# Altium PCB lower-pcb.PcbDoc
Units mm, origin at the board's own origin, x right, y up, seen from the top; angles counter-clockwise.
Board outline 46.4 x 79.5 mm, 2 copper layers (Top Layer, Bottom Layer), stack 1.621 mm thick; 36 components, 27 nets, 83 pads, 4 vias.
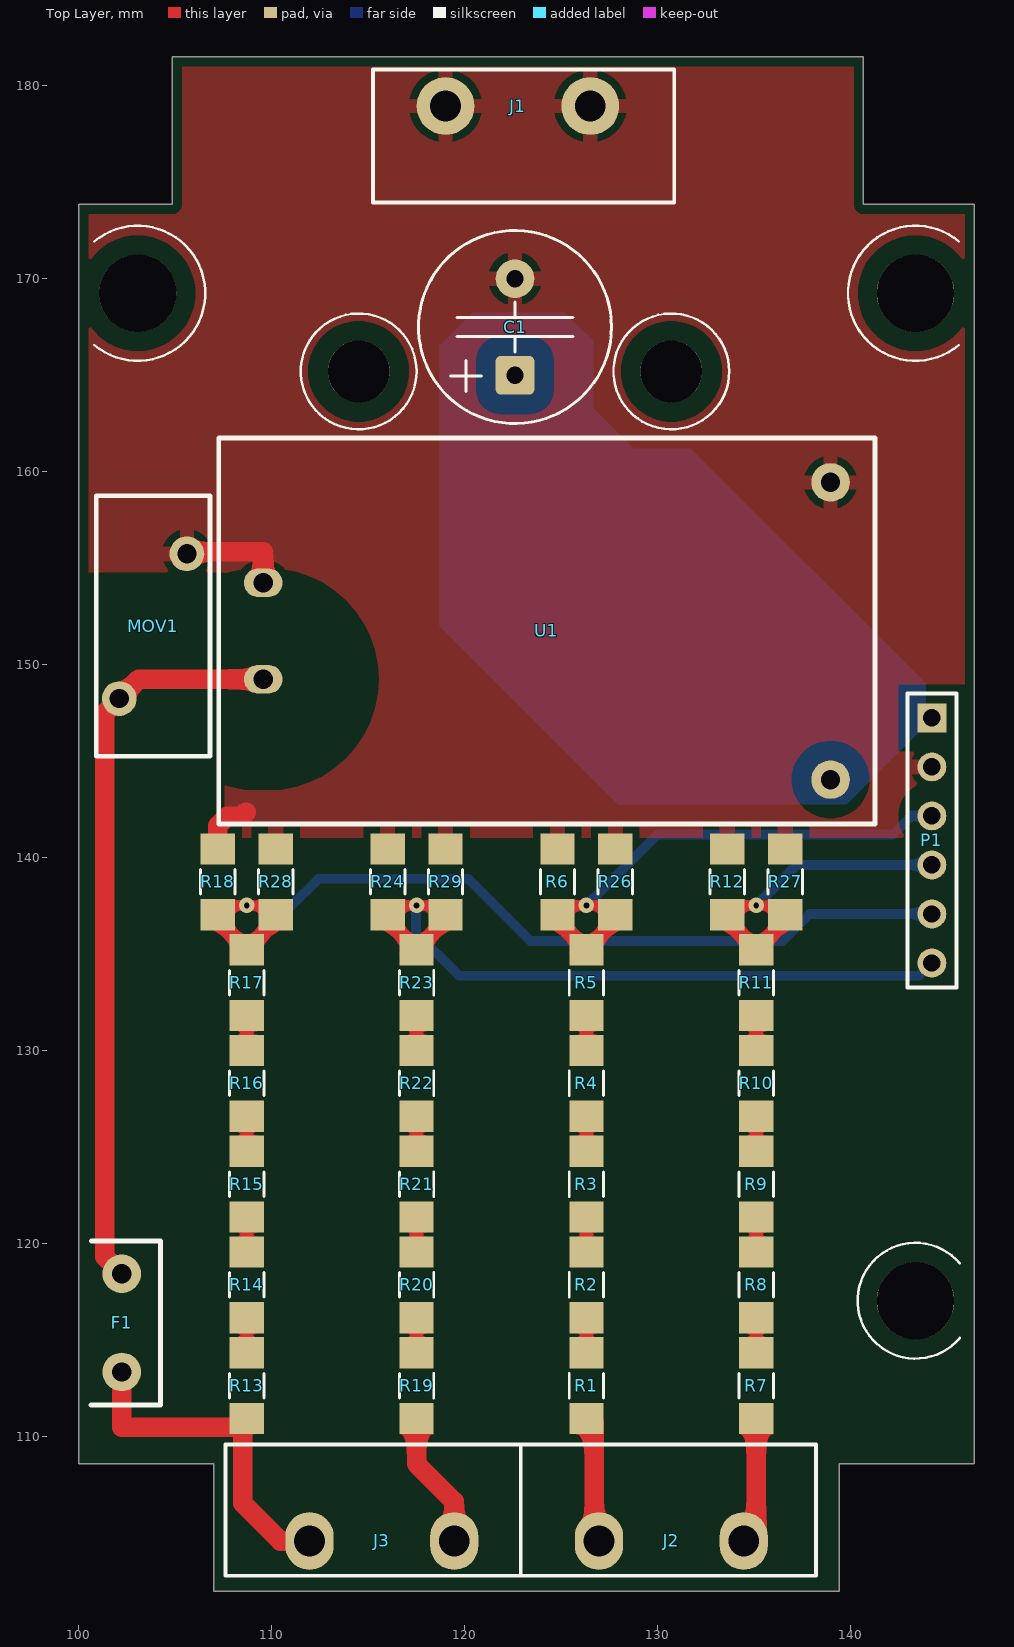
[diagram p0: Top Layer view]
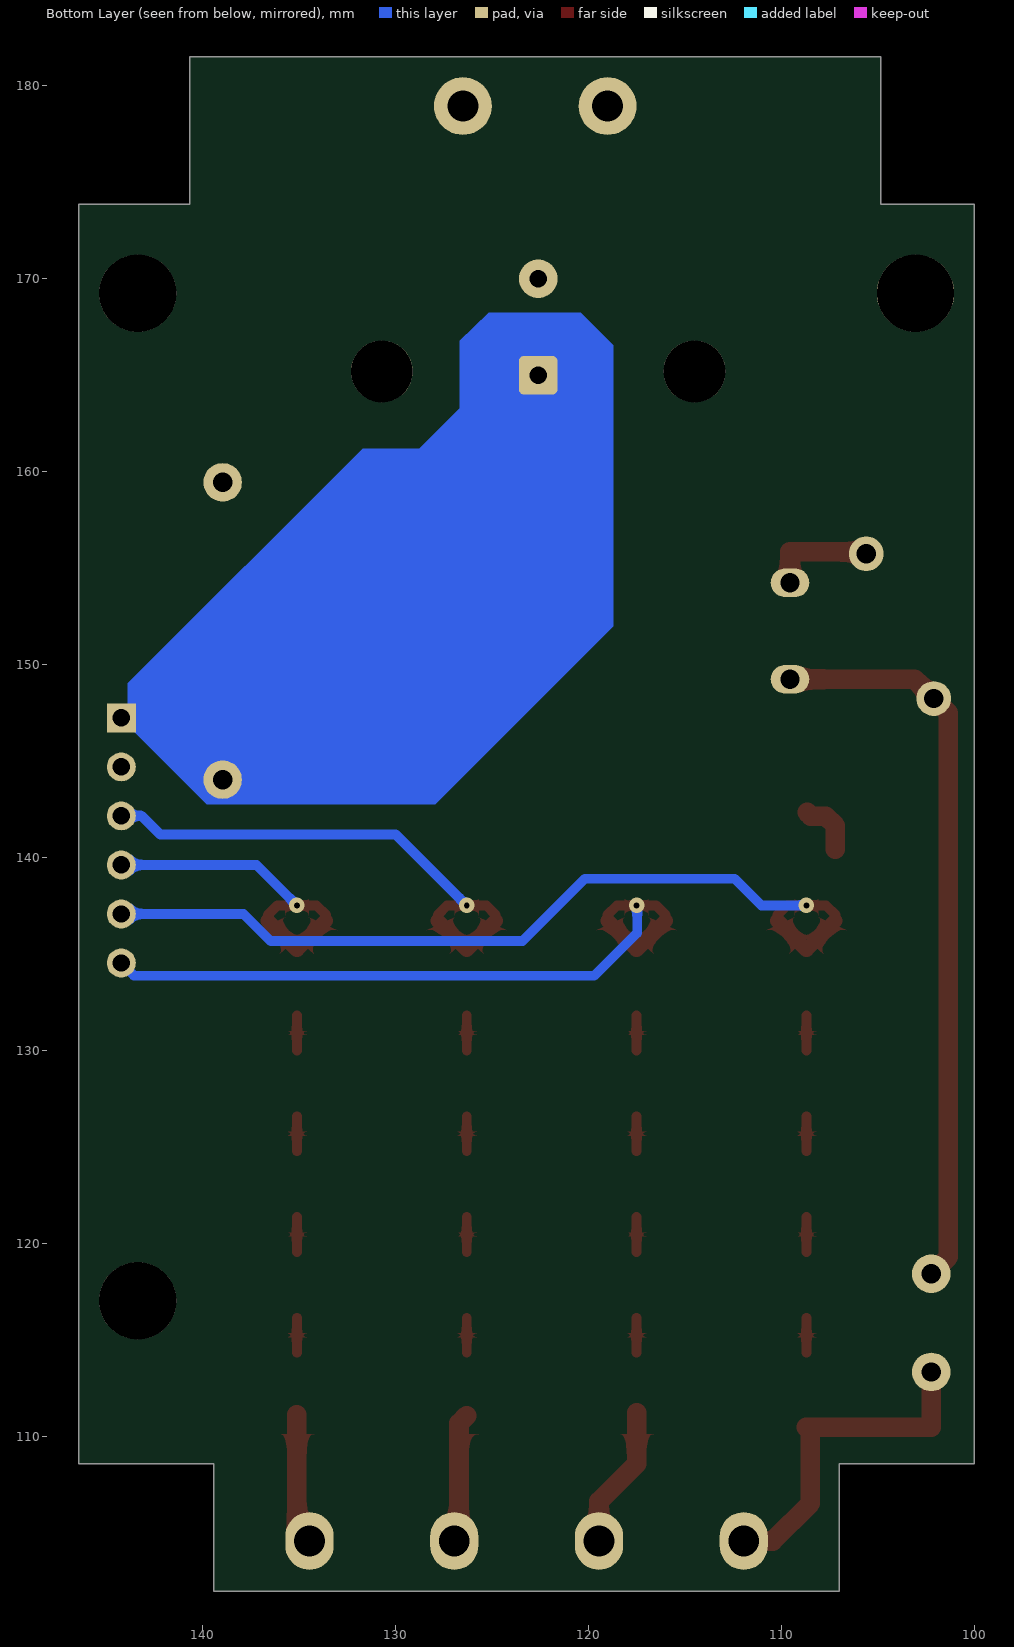
[diagram p1: Bottom Layer view, seen from below]
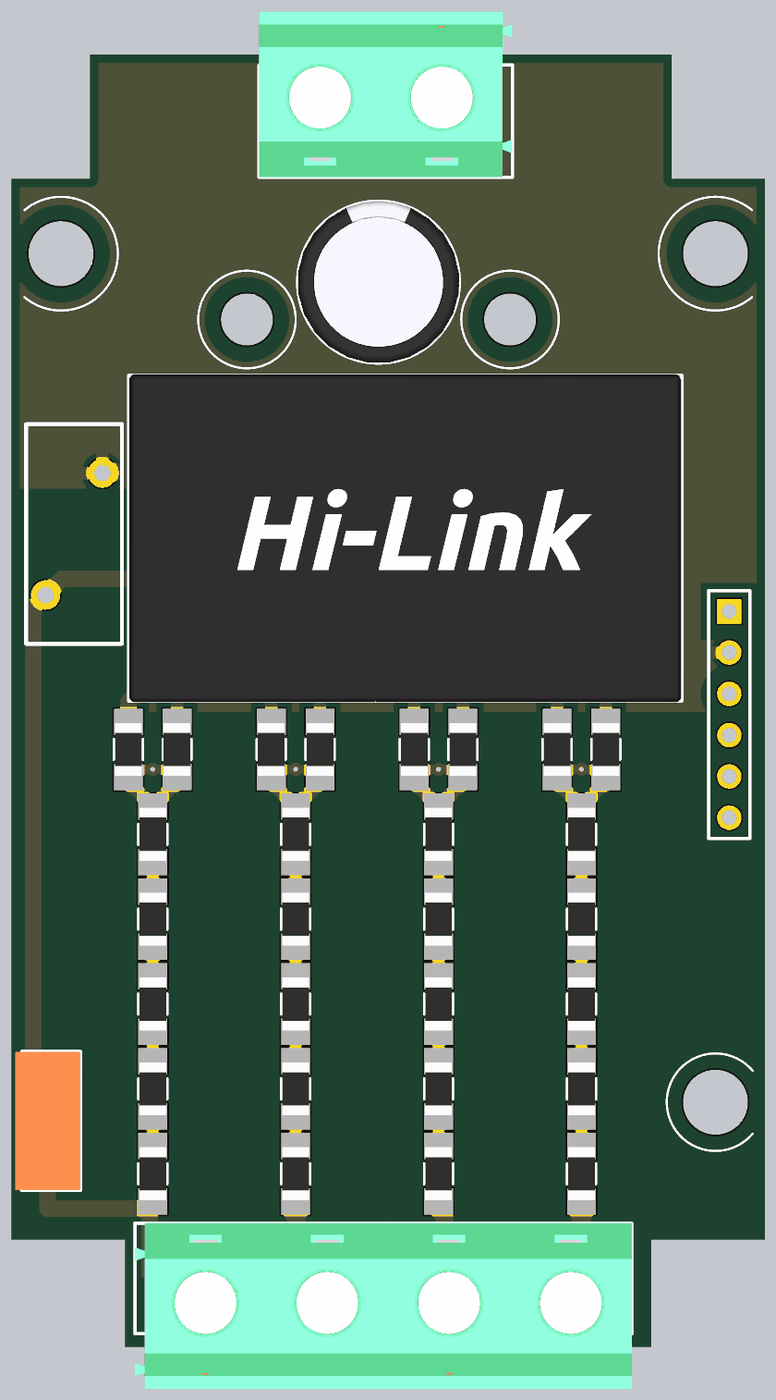
[diagram p2: 3D render of the assembled board from above, using the file's embedded part models]

## Layer stack, top to bottom
Top Solder: solder mask 0.0102, Solder Resist, Dk 3.5
Top Layer: signal copper 0.0356
Dielectric 1: dielectric 1.55, FR-4, Dk 4.8
Bottom Layer: signal copper 0.0356
Bottom Solder: solder mask 0.0102, Solder Resist, Dk 3.5

## Board outline
100,108.6 100,173.85 104.85,173.85 104.85,181.5 140.65,181.5 140.65,173.85 146.4,173.85 146.4,108.6 139.4,108.6 139.4,102 107,102 107,108.6

## Design rules (kind name [scope] priority, off if disabled: settings)
BoardOutlineClearance [All] p1: gap=0.5 ignorepadtopadclearanceinfootprint=FALSE
Clearance Clearance_polygon_HV [InPolygon vs InNetClass('HV')] p1: gap=5 ignorepadtopadclearanceinfootprint=FALSE
Clearance [All] p2: gap=0.254 ignorepadtopadclearanceinfootprint=FALSE except(1: Arc-Poly Track-Poly SMDPad-Poly THPad-Poly Via-Poly Fill-Poly Poly-Poly Poly-Region Poly-Text Poly-Hole)
ComponentClearance ComponentClearance_1 [InComponent('No Component') vs InComponent('No Component')] p1: gap=0 collisioncheckmode=3 verticalgap=0 showdistances=FALSE donotcheckwithout3dbody=TRUE
ComponentClearance ComponentClearance_2 [HasFootprint('DG128-7.5-02P-14') vs HasFootprint('DG128-7.5-02P-14')] p2: gap=0 collisioncheckmode=3 verticalgap=0 showdistances=FALSE donotcheckwithout3dbody=TRUE
ComponentClearance [All] p3: gap=0.254 collisioncheckmode=3 verticalgap=0.254 showdistances=FALSE donotcheckwithout3dbody=TRUE
HoleSize [All] p1: absolutevalues=TRUE maxlimit=5 minlimit=0.3 maxpercent=80.000 minpercent=20.000
MinimumAnnularRing [All] p1: minimumring=0.203
MinimumSolderMaskSliver BQFN41 [HasFootprint('BQFN41_11x9')] p1: minsoldermaskwidth=0
MinimumSolderMaskSliver [All] p2: minsoldermaskwidth=0.025
PolygonConnect VIA [IsVia] p1: connectstyle=Direct reliefconductorwidth=0.254 reliefentries=4 polygonreliefangle="90 Angle" airgapwidth=0.254
PolygonConnect [All] p2: connectstyle=Relief reliefconductorwidth=0.762 reliefentries=4 polygonreliefangle="90 Angle" airgapwidth=0.381
RoutingVias [All] p1: holewidth=0.3 width=0.8 viastyle="Through Hole" minholewidth=0.3 minwidth=0.8 maxholewidth=0.3 maxwidth=0.8
SilkToSilkClearance [All] p1: silktosilkclearance=0.025
SilkToSolderMaskClearance [IsPad] p1: minsilkscreentomaskgap=0.025 clearancetoexposedcopper=TRUE
SolderMaskExpansion [All] p1: expansion=0.102 istentingtop=FALSE
Width [All] p1: maxlimit=2.54 minlimit=0.178 preferedwidth=0.254 minimp=50.000000 maximp=50.000000 favimp=50.000000
25 further rules are at their usual default settings.

## Classes and differential pairs
net class HV: NetF1_2

## Components (designator, comment, footprint, x,y, rotation, side; value= is the part's Value field where it differs from the comment)
C1 "Electrolytic Capacitor" CE_D_10x16x5_THT 122.6,167.5 r90 top value=220uF
F1 "Fuse" F_TE5_8.5x4 102.23,115.9 r90 top value=883114
J1 "Terminal Blocks 2P 7.5mm" DG128-7.5-02P-14#1 122.75,178.95 r180 top value=DG128-7.5-02P-14
J2 "Terminal Blocks 2P 7.5mm" DG128-7.5-02P-14#2 130.7,104.6 r0 top locked value=DG128-7.5-02P-14
J3 "Terminal Blocks 2P 7.5mm" DG128-7.5-02P-14#2 115.7,104.6 r0 top locked value=DG128-7.5-02P-14
MOV1 "MOV" MOV_AXIAL_7.5_3.5 103.85,152 r90 top value=B72214P2301K103
P1 "Goldpin" P_HEADER_1x6_2.54 144.2,140.9 r270 top value=DS1021-1*6SF1-1
R1 "Resistor" R_1206_3216 126.3,112.65 r90 top value=499k
R2 "Resistor" R_1206_3216 126.3,117.87 r90 top value=499k
R3 "Resistor" R_1206_3216 126.3,123.09 r90 top value=499k
R4 "Resistor" R_1206_3216 126.3,128.31 r90 top value=499k
R5 "Resistor" R_1206_3216 126.3,133.53 r90 top value=499k
R6 "Resistor" R_1206_3216 124.8,138.75 r90 top value=100k
R7 "Resistor" R_1206_3216 135.1,112.65 r90 top value=499k
R8 "Resistor" R_1206_3216 135.1,117.87 r90 top value=499k
R9 "Resistor" R_1206_3216 135.1,123.09 r90 top value=499k
R10 "Resistor" R_1206_3216 135.1,128.31 r90 top value=499k
R11 "Resistor" R_1206_3216 135.1,133.53 r90 top value=499k
R12 "Resistor" R_1206_3216 133.6,138.75 r90 top value=100k
R13 "Resistor" R_1206_3216 108.7,112.65 r90 top value=499k
R14 "Resistor" R_1206_3216 108.7,117.87 r90 top value=499k
R15 "Resistor" R_1206_3216 108.7,123.09 r90 top value=499k
R16 "Resistor" R_1206_3216 108.7,128.31 r90 top value=499k
R17 "Resistor" R_1206_3216 108.7,133.53 r90 top value=499k
R18 "Resistor" R_1206_3216 107.2,138.75 r90 top value=100k
R19 "Resistor" R_1206_3216 117.5,112.65 r90 top value=499k
R20 "Resistor" R_1206_3216 117.5,117.87 r90 top value=499k
R21 "Resistor" R_1206_3216 117.5,123.09 r90 top value=499k
R22 "Resistor" R_1206_3216 117.5,128.31 r90 top value=499k
R23 "Resistor" R_1206_3216 117.5,133.53 r90 top value=499k
R24 "Resistor" R_1206_3216 116,138.75 r90 top value=100k
R26 "Resistor" R_1206_3216 127.8,138.75 r90 top value=100k
R27 "Resistor" R_1206_3216 136.6,138.75 r90 top value=100k
R28 "Resistor" R_1206_3216 110.2,138.75 r90 top value=100k
R29 "Resistor" R_1206_3216 119,138.75 r90 top value=100k
U1 "5V Mains power supply" VS_HLK-PMxx 124.25,151.75 r0 top locked value=HLK-PM01

## Footprints (in the part's own frame and the unit in brackets; to place one, negate y for a bottom-side part, rotate by r counter-clockwise, add the part's x,y. Pads: shape width x height; smd on the part's side, far side on the other; paste and mask are expansions set on the pad)
CE_D_10x16x5_THT [mm]
  rrect25% 2x2 hole 0.9: 1(-2.5,0)
  round 2 hole 0.9: 2(2.5,0)
  silkscreen extent -5,-5 5,5, body extent -4.96,-4.97 4.95,4.96, height 20
DG128-7.5-02P-14#1 [mm]
  round 3 hole 1.6: 1(-3.75,0) 2(3.75,0)
  silkscreen extent -8.1,-1.9 7.5,5, body extent -8.1,-5.2 7.5,5, height 14
DG128-7.5-02P-14#2 [mm]
  oval 2.5x3 hole 1.6: 1(-3.75,0) 2(3.75,0)
  silkscreen extent -7.8,-1.8 7.5,5, body extent -8.1,-5.2 7.5,5, height 14
F_TE5_8.5x4 [mm]
  round 2 hole 1 paste-2539.97 mask+0: 1(-2.54,0) 2(2.54,0)
  silkscreen extent -4.25,-2 4.25,1.59, body extent -4.25,-2 4.25,2, height 8.55
MOV_AXIAL_7.5_3.5 [mm]
  round 1.8 hole 1: 1(3.75,-1.75) 2(-3.75,1.75)
  silkscreen extent -6.74,-2.95 6.76,2.95
P_HEADER_1x6_2.54 [mm] "Connector; Header; 6 Position, Male"
  rect 1.5x1.5 hole 0.9: 1(-6.35,0)
  round 1.5 hole 0.9: 2(-3.81,0) 3(-1.27,0) 4(1.27,0) 5(3.81,0) 6(6.35,0)
  silkscreen extent -7.62,-1.27 7.62,1.27
R_1206_3216 [mil]
  rect 64x70 smd: 1(-67,0) 2(67,0)
  silkscreen extent -25,-35 25,35, body extent -64,-32 64,32, height 27
VS_HLK-PMxx [mm]
  oval 2x1.5 hole 1: 1(-14.7,2.5) 2(-14.7,-2.5)
  round 2 hole 1: 3(14.7,7.7) 4(14.7,-7.7)
  silkscreen extent -17,-10 17,10, body extent -17,-10.1 17,10.1, height 15.1

## Part data
C1: library part CE_680uF_16V_AL2O3_10x16x5_20, "Polarized Capacitor", Dielectric=AL2O3, Manufacturer=Panasonic, Manufacturer Part Number=EEU-FC1C681, Supplier Part Number 1=EEUFC1C681, Tolerance (%)=20, Voltage=16V, HelpURL=https://datasheet.octopart.com/EEU-FC1C681-Panasonic-datasheet-5313828.pdf, Part Number=CE_680uF_16V_AL2O3_10x16x5_20, SCH_Footprint=10x16x5, Supplier 1=TME, Supplier 2="RS Components", Supplier 3=Farnell, Supplier 4=Mouser, Supplier 5=Digi-Key, Supplier 6=LCSC, Supplier Part Number 2=572176, Supplier Part Number 3=2326274, Supplier Part Number 4=667-EEU-FC1C681, Supplier Part Number 5=P10250-ND
F1: library part F_500mA_250V_TE5_8.5x4, Current=500mA, Manufacturer=ESKA, Manufacturer Part Number=883114, Voltage=250V, HelpURL=https://www.tme.eu/Document/a40ea296602c4335b0d3d6f44eb25624/883.100_2019_01.pdf, Part Number=F_500mA_250V_TE5_8.5x4, SCH_Footprint=8.5x4mm, Supplier 1=TME, Supplier 2="RS Components", Supplier 3=Farnell, Supplier 4=Mouser, Supplier 5=Digi-Key, Supplier 6=LCSC, Supplier Part Number 1=883114
J1 J2 J3: library part J_DG128-7.5-02P-14, "ARK Screw terminal, 2-Pin", Manufacturer="DEGSON ELECTRONICS", Manufacturer Part Number=DG128-7.5-02P-14, Supplier Part Number 1=DG128-7.5-02P14, HelpURL=https://www.tme.eu/Document/265c0002552eeae045ca30ec463f477a/DG128-7.5.pdf, Part Number=J_DG128-7.5-02P-14, SCH_Footprint=7.5mm, Supplier 1=TME, Supplier 2="RS Components", Supplier 3=Farnell, Supplier 4=Mouser, Supplier 5=Digi-Key, Supplier 6=LCSC
MOV1: library part MOV_385VDC_300VAC_THT, "Varistor", Manufacturer=Epcos, Manufacturer Part Number=B72214P2301K103, Voltage=385VDC/300VAC, HelpURL=https://product.tdk.com/en/system/files?file=dam/doc/product/protection/voltage/lead-disk-varistor/data_sheet/70/db/var/siov_leaded_advanced_mp_s14_compact_series.pdf, Part Number=MOV_385VDC_300VAC_THT, SCH_Footprint=7.5x3.5_THT, Supplier 1=TME, Supplier 2="RS Components", Supplier 3=Farnell, Supplier 4=Mouser, Supplier 5=Digi-Key, Supplier 6=LCSC, Supplier Part Number 3=3359824, Supplier Part Number 4=871-B72214P2301K103, Supplier Part Number 5=495-B72214P2301K103-ND
P1: library part P_HEADER_1x6_2.54, "Pin Header", Manufacturer=Connfly, Manufacturer Part Number=DS1021-1*6SF1-1, Supplier Part Number 1=ZL201-06G, HelpURL=http://www.tme.eu/en/Document/cc301e58a5da78cb543a94b5a5b7f06a/DS1021.pdf, Part Number=P_HEADER_1x6_2.54, SCH_Footprint="1x6 2.54mm", Supplier 1=TME, Supplier 2="RS Components", Supplier 3=Farnell, Supplier 4=Mouser, Supplier 5=Digi-Key, Supplier 6=LCSC
R1 R2 R3 R4 R5 R7 R8 R9 R10 R11 R13 R14 R15 R16 R17 R19 R20 R21 R22 R23: library part R_499k_1206_1, Manufacturer=Yageo, Manufacturer Part Number=RC1206FR-07499KL, Power=250mW, Tolerance=1%, Voltage=200V, HelpURL=https://www.tme.eu/Document/2f2597e8e9126be8f2c43440d3744b92/rc1206yageo.pdf, Part Number=R_499k_1206_1, SCH_Footprint=1206, Supplier 1=TME, Supplier 2="RS Components", Supplier 3=Farnell, Supplier 4=Mouser, Supplier 5=Digi-Key, Supplier 6=LCSC, Supplier Part Number 1=RC1206FR-07499KL, Supplier Part Number 4=603-RC1206FR-07499KL, Supplier Part Number 5=311-499KFRCT-ND
R6 R12 R18 R24 R26 R27 R28 R29: library part R_100k_1206_1, Manufacturer=Yageo, Manufacturer Part Number=RC1206FR-07100KL, Power=250mW, Supplier Part Number 1=RC1206FR-07100K, Tolerance=1%, Voltage=200V, HelpURL=https://www.tme.eu/pl/Document/2f2597e8e9126be8f2c43440d3744b92/rc1206yageo.pdf, Part Number=R_100k_1206_1, SCH_Footprint=1206, Supplier 1=TME, Supplier 2="RS Components", Supplier 3=Farnell, Supplier 4=Mouser, Supplier 5=Digi-Key, Supplier 6=LCSC, Supplier Part Number 3=2693771, Supplier Part Number 4=603-RC1206FR-07100KL, Supplier Part Number 5=311-100KFRDKR-ND
U1: library part VS_HLK-PM01, Frequency (kHz)=0, Manufacturer=Hi-Link, Manufacturer Part Number=HLK-PM01, HelpURL=https://datasheet.lcsc.com/szlcsc/1909111105_HI-LINK-HLK-PM24_C399250.pdf, Imax (A)=0.6, Iswitch (A)=0, Part Number=VS_HLK-PM01, SCH_Footprint=34x20mm, Supplier 1=TME, Supplier 2="RS Components", Supplier 3=Farnell, Supplier 4=Mouser, Supplier 5=Digi-Key, Supplier 6=LCSC, Supplier 7=Botland, Supplier Part Number 6=C209903, Supplier Part Number 7=DNG-10929, Topology=Other, Vin max (V)=245, Vin min (V)=90, Vout max (V)=5.2, Vout min (V)=4.8

## Free pads (board coordinates)
  round 4 hole 4 unplated: ""(103.05,169.25) ""(143.35,117.05) ""(143.35,169.25)
  round 3.2 hole 3.2 unplated: ""(114.5,165.2) ""(130.7,165.2)

## Via types
v1: diameter 0.8, hole 0.3, Top Layer to Bottom Layer, tented both sides, 4 vias

## Nets (pads, with @x,y where several pads share a name; then routed paths per layer and width w, separated by ;. In a path a pad name is that pad's centre, name@x,y a point inside that pad or via, vN(x,y) a via of type N, cw(c..) or ccw(c..) an arc to the next point about the centre after c; other vN are vias at no path point)
+5V: C1.1 P1.1 U1.4 | length 6.6
  Top Layer w0.508: P1.1@144.17,147.28 P1.1
  Bottom Layer w1.27: U1.4 142.15,147.25 P1.1
L1: F1.1 J3.1 R13.1 | length 17.6
  Top Layer w1.016: F1.1 102.23,110.498 108.7,110.498 108.5,110.298 108.5,106.55 110.45,104.6 J3.1
L2: J3.2 R19.1 | length 7.5
  Top Layer w1.016: R19.1@117.5,111.248 117.5,108.6 119.45,106.65 J3.2
L3: J2.1 R1.1 | length 6.8
  Top Layer w1.016: R1.1@126.3,111.098 126.7,110.698 126.7,104.85 J2.1
L4: J2.2 R7.1 | length 6.8
  Top Layer w1.016: J2.2 135.1,105.25 R7.1@135.1,111.148
N: C1.2 J1.1 J1.2 MOV1.1 P1.2 R6.2 R12.2 R18.2 R24.2 R26.2 R27.2 R28.2 R29.2 U1.1 U1.3 | length 8.5
  Top Layer w1.016: MOV1.1 105.7,155.85 109.55,155.85 U1.1 ; R18.2 107.2,141.66 107.7,142.16 108.47,142.16 108.66,142.35
NetF1_2: F1.2 MOV1.2 U1.2 | length 38.3
  Top Layer w1.016: F1.2 101.35,119.32 101.35,147.5 MOV1.2 103.1,149.25 U1.2
NetR1_2: R1.2 R2.1 | length 1.8
  Top Layer w0.508: R1.2 R2.1
NetR2_2: R2.2 R3.1 | length 1.8
  Top Layer w0.508: R2.2 R3.1
NetR3_2: R3.2 R4.1 | length 1.8
  Top Layer w0.508: R3.2 R4.1
NetR4_2: R4.2 R5.1 | length 1.8
  Top Layer w0.508: R4.2 R5.1
NetR7_2: R7.2 R8.1 | length 1.8
  Top Layer w0.508: R7.2 R8.1
NetR8_2: R8.2 R9.1 | length 1.8
  Top Layer w0.508: R8.2 R9.1
NetR9_2: R9.2 R10.1 | length 1.8
  Top Layer w0.508: R9.2 R10.1
NetR10_2: R10.2 R11.1 | length 1.8
  Top Layer w0.508: R10.2 R11.1
NetR13_2: R13.2 R14.1 | length 1.8
  Top Layer w0.508: R13.2 R14.1
NetR14_2: R14.2 R15.1 | length 1.8
  Top Layer w0.508: R14.2 R15.1
NetR15_2: R15.2 R16.1 | length 1.8
  Top Layer w0.508: R15.2 R16.1
NetR16_2: R16.2 R17.1 | length 1.8
  Top Layer w0.508: R16.2 R17.1
NetR19_2: R19.2 R20.1 | length 1.8
  Top Layer w0.508: R19.2 R20.1
NetR20_2: R20.2 R21.1 | length 1.8
  Top Layer w0.508: R20.2 R21.1
NetR21_2: R21.2 R22.1 | length 1.8
  Top Layer w0.508: R21.2 R22.1
NetR22_2: R22.2 R23.1 | length 1.8
  Top Layer w0.508: R22.2 R23.1
P1: P1.5 R17.2 R18.1 R28.1 | length 45.9
  Top Layer w0.508: R18.1@107.2,136.732 R18.1 107.682,137.53 v1(108.7,137.53) 109.718,137.53 R28.1
  Top Layer w0.762: R18.1@107.2,136.732 R17.2 R28.1@110.2,136.732
  Bottom Layer w0.508: v1(108.7,137.53) 111.03,137.53 112.41,138.91 120.19,138.91 123.41,135.69 136.46,135.69 137.86,137.09 P1.5
P2: P1.6 R23.2 R24.1 R29.1 | length 37
  Top Layer w0.508: R24.1 116.482,137.53 v1(117.5,137.53) 118.518,137.53 R29.1
  Top Layer w0.762: R24.1@116,136.732 R23.2 R29.1@119,136.732
  Bottom Layer w0.508: v1(117.5,137.53) 117.47,137.5 117.47,136.11 119.69,133.89 143.54,133.89 P1.6
P3: P1.3 R5.2 R6.1 R26.1 | length 27.5
  Top Layer w0.508: R6.1 125.282,137.53 v1(126.3,137.53) 127.318,137.53 R26.1
  Top Layer w0.762: R6.1@124.8,136.732 R5.2 R26.1@127.8,136.732
  Bottom Layer w0.508: v1(126.3,137.53) 129.98,141.21 132.31,141.21 142.18,141.21 143.14,142.17 P1.3
P4: P1.4 R11.2 R12.1 R27.1 | length 19.7
  Top Layer w0.508: R12.1 134.082,137.53 v1(135.1,137.53) 136.118,137.53 R27.1
  Top Layer w0.762: R12.1@133.6,136.732 R11.2 R27.1@136.6,136.732
  Bottom Layer w0.508: v1(135.1,137.53) 137.2,139.63 ; 139.29,139.63 137.2,139.63 ; P1.4 137.2,139.63

## Polygon pours and split planes (outlines as drawn)
N on Top Layer "N_L01_P000" (solid, remove dead copper, pour order 0): 108.9,153.4 113.05,149.25 107.55,143.75 107.55,141.05 146.4,141.05 146.4,173.85 140.65,173.85 140.65,183.5 104.85,183.5 104.85,173.85 100,173.85 100,154.8 107.5,154.8

## Other copper
Bottom Layer:
  region net +5V: 120.386,168.236 118.7,166.55 118.7,152 127.92,142.78 139.78,142.78 143.87,146.87 143.87,149.03 131.7,161.2 128.75,161.2 126.65,163.3 126.65,166.8 125.15,168.236

## Silkscreen, mask and mechanical layers (free items; w line width, h text height)
Top Overlay:
  circle w0.127: c114.5,165.2 r3
  circle w0.127: c130.7,165.2 r3
  lines w0.127: 100.8,166.569 ccw(c103.05,169.25) 100.8,171.931 ; 145.6,166.569 cw(c143.35,169.25) 145.6,171.931 ; 145.648,115.122 cw(c143.35,117.05) 145.648,118.978
Mechanical 1:
  the board outline again, w0.254